# Altium PCB 电源1.PcbDoc
Units mil, origin at the board's own origin, x right, y up, seen from the top; angles counter-clockwise.
Board outline 3937.01 x 3937.01 mil, 2 copper layers (Top Layer, Bottom Layer); 57 components, 27 nets, 132 pads, 4 vias.
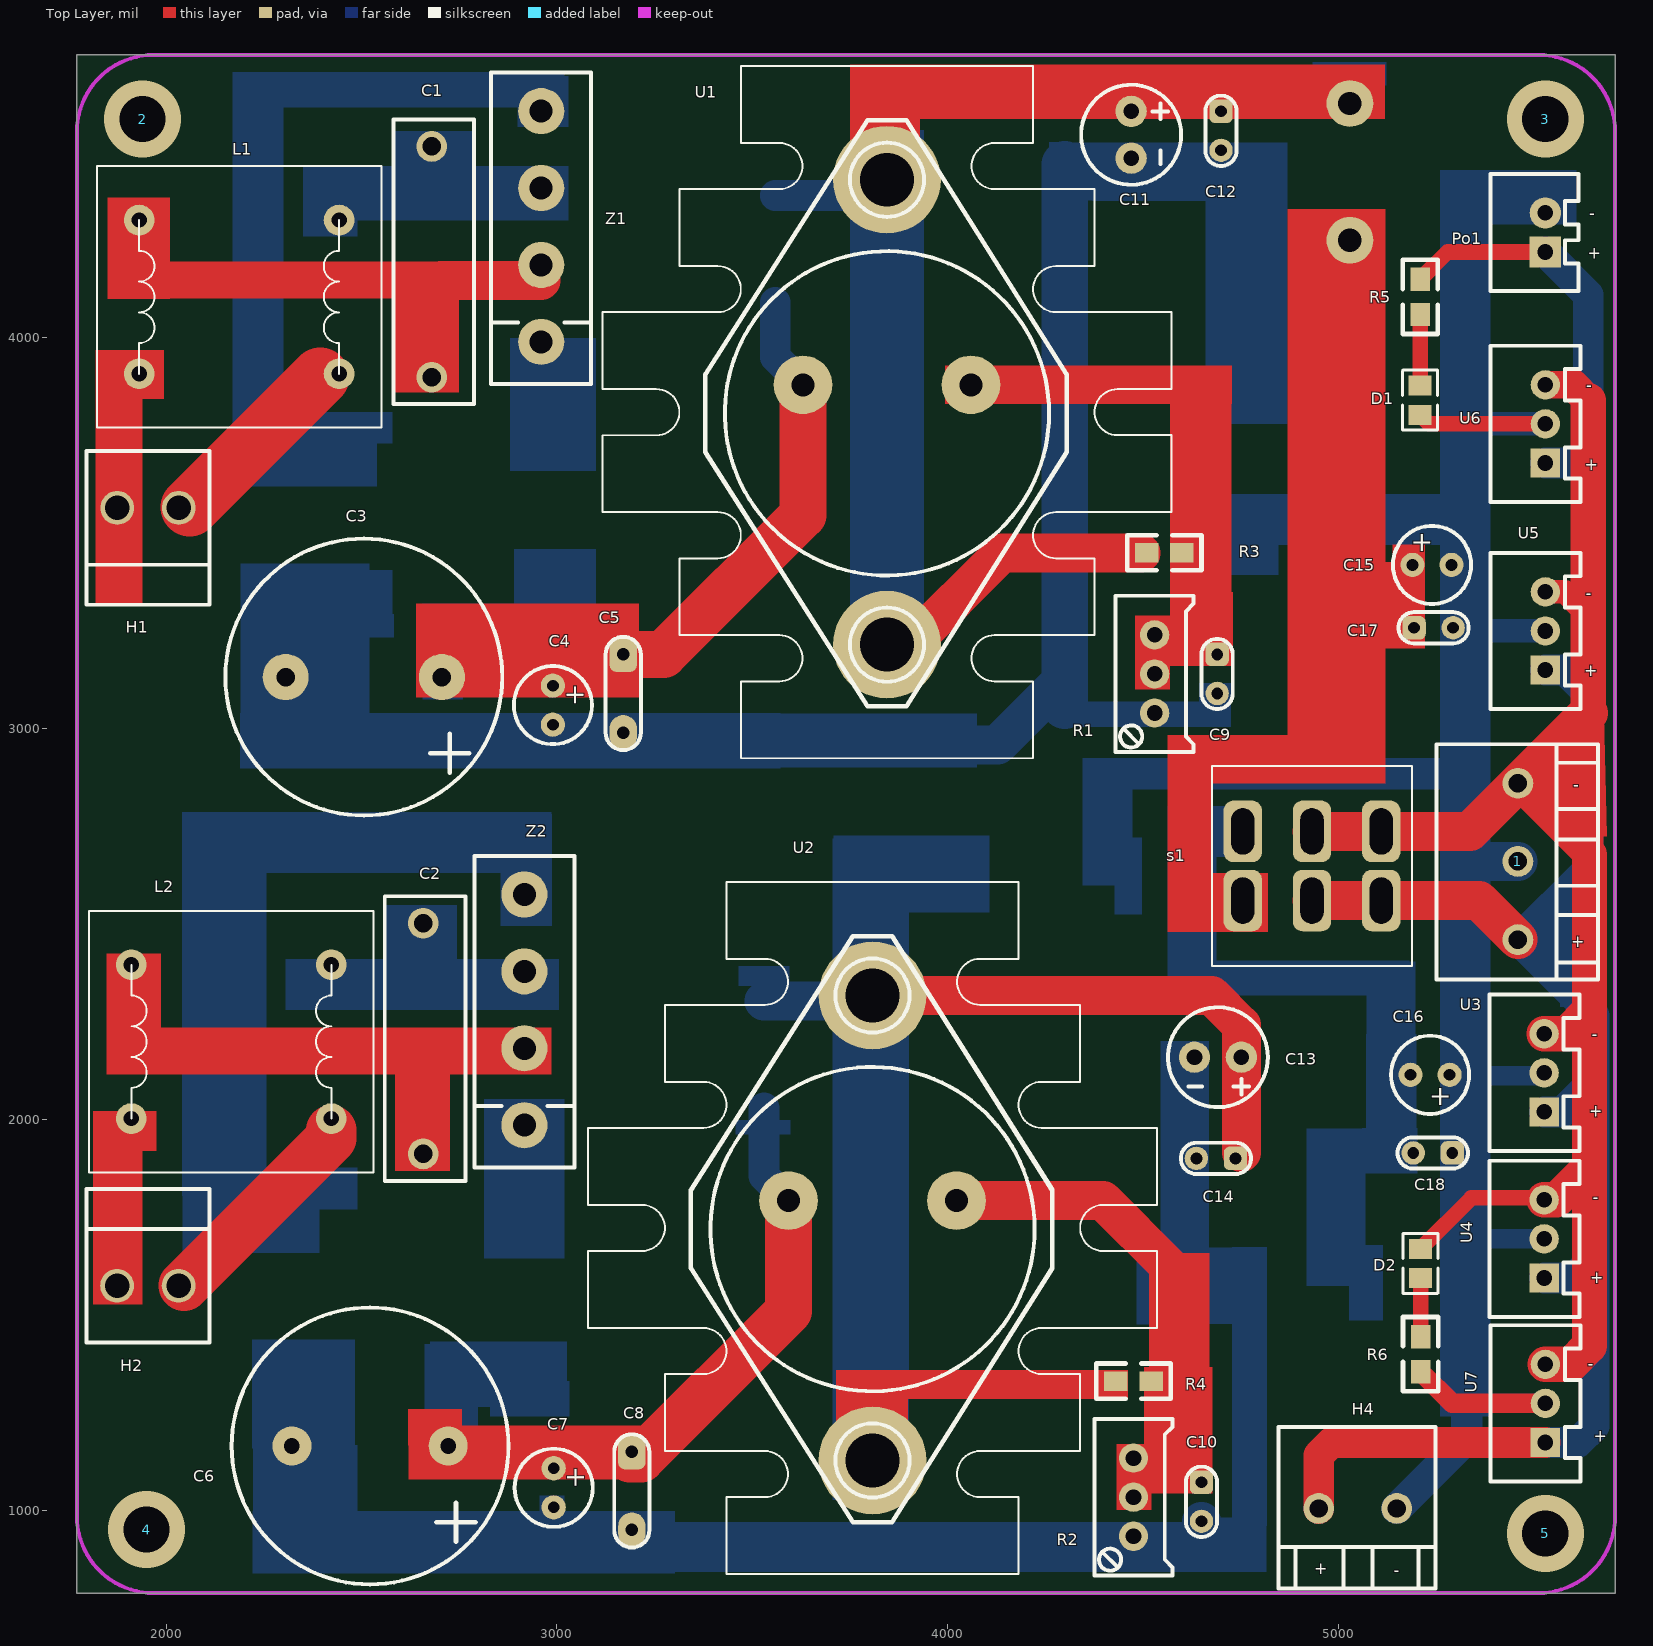
[diagram p0: Top Layer view]
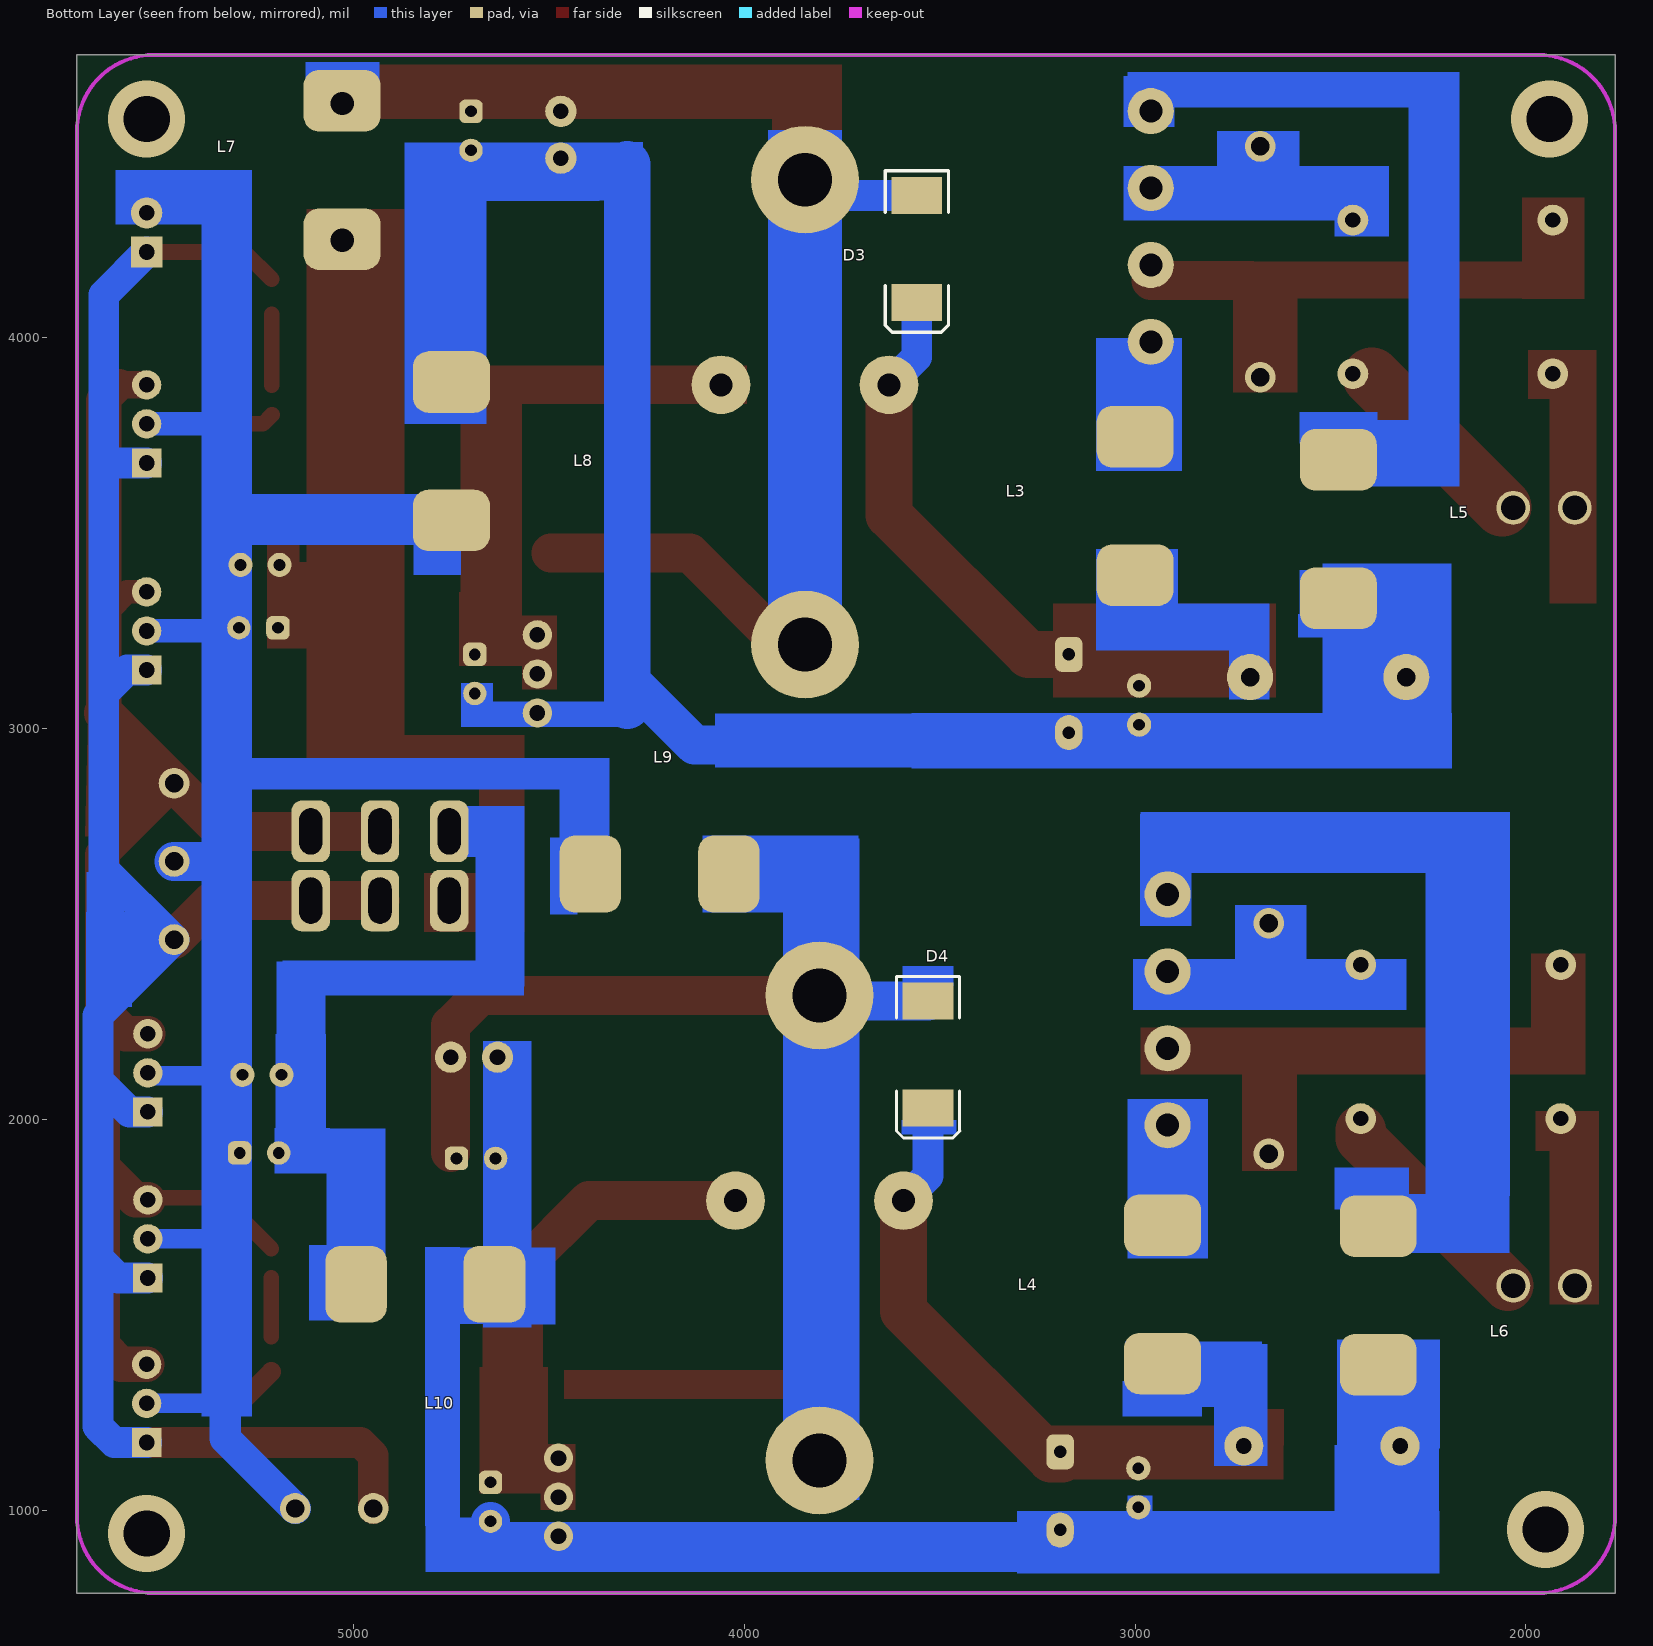
[diagram p1: Bottom Layer view, seen from below]

## Layer stack, top to bottom
Top Solder: solder mask 0.4, Solder Resist, Dk 3.5
Top Layer: signal copper 1.4
Dielectric1: dielectric 12.6, FR-4, Dk 4.8
Bottom Layer: signal copper 1.4
Bottom Solder: solder mask 0.4, Solder Resist, Dk 3.5

## Board outline
1771.65,4724.41 1771.65,787.4 5708.66,787.4 5708.66,4724.41 1771.65,4724.41

## Design rules (kind name [scope] priority, off if disabled: settings)
Clearance [All] p1: gap=10
Height [All] p1: minheight=0 maxheight=2362.2 prefheight=500
HoleSize [All] p1: absolutevalues=TRUE maxlimit=2362.2 minlimit=1 maxpercent=80.000 minpercent=20.000
MinimumSolderMaskSliver [All] p1: minsoldermaskwidth=0
PolygonConnect [All] p1: connectstyle=Relief reliefconductorwidth=10 reliefentries=4 polygonreliefangle="90 Angle" airgapwidth=10
RoutingVias [All] p1: holewidth=28 width=50 viastyle="Through Hole" minholewidth=28 minwidth=50 maxholewidth=1574.8 maxwidth=2362.2
SilkToSilkClearance [All] p1: silktosilkclearance=0
SilkToSolderMaskClearance [IsPad] p1: minsilkscreentomaskgap=0 clearancetoexposedcopper=TRUE
SolderMaskExpansion [All] p1: expansion=4
Width [All] p1: maxlimit=787.4 minlimit=10 preferedwidth=10
24 further rules are at their usual default settings.

## Components (designator, comment, footprint, x,y, rotation, side; value= is the part's Value field where it differs from the comment)
1 "KF128-5.08-3P" KF128-5.08-3P 5460,2860 r90 top
2 "螺丝孔" 固定过孔 1940,4560 r90 top
3 "螺丝孔" 固定过孔 5530,4560 r90 top
4 "螺丝孔" 固定过孔 1950,950 r90 top
5 "螺丝孔" 固定过孔 5530,940 r90 top
C1 "" 安规电容 2680,4490 r180 top
C2 "Cap1" 安规电容 2658,2502 r180 top
C3 "Cap1" 4700UF_50V#1 2706,3132 r180 top
C4 "Cap1" 22UF_50V 2990,3110 r270 top
C5 "Cap1" 独石电容 3170,3190 r180 top
C6 "Cap1" 4700UF_50V#2 2722,1164 r180 top
C7 "Cap1" 22UF_50V 2992,1107 r270 top
C8 "Cap1" 独石电容 3192,1149 r180 top
C9 "Cap" 陶瓷电容 4690,3190 r90 top
C10 "Cap" 陶瓷电容 4650,1071 r90 top
C11 "Cap" "C DIP DIA6.3" 4470,4580 r270 top
C12 "Cap" 陶瓷电容 4700,4580 r90 top
C13 "Cap" "C DIP DIA6.3" 4752,2159 r180 top
C14 "Cap" 陶瓷电容 4737,1900 r0 top
C15 "Cap" 22UF_50V 5190,3419 r0 top
C16 "Cap" 22UF_50V 5285,2114 r180 top
C17 "Cap" 陶瓷电容 5194,3258 r180 top
C18 "Cap" 陶瓷电容 5292,1914 r0 top
D1 "LED" 0805_s 5223,3820 r270 top
D2 "LED" 0805_s 5197,1652 r90 top
D3 "1N4002" SMC 3559,4228 r270 bottom
D4 "1N4002" SMC 3530,2166 r270 bottom
H1 "HT3.96-2P" HT39.6-2P-S 1875,3565 r90 top
H2 "HT3.96-2P" HT39.6-2P-S 2032,1574 r270 top
H4 "KF128-5.08-2P" KF128-5.08-2P 5150,1004 r0 top
L1 "扼流线圈" 扼流线圈 1931,3908 r90 top
L2 "扼流线圈" 扼流线圈 1911,2002 r90 top
L3 "SMD" "功率电感-12x12 - duplicate" 3000,3570 r270 bottom
L4 "SMD" "功率电感-12x12 - duplicate" 2930,1552 r270 bottom
L5 "SMD" "功率电感-12x12 - duplicate" 2480,3511 r270 bottom
L6 "SMD" "功率电感-12x12 - duplicate" 2378,1549 r270 bottom
L7 "SMD" "功率电感-12x12 - duplicate" 5030,4430 r270 bottom
L8 "SMD" "功率电感-12x12 - duplicate" 4750,3710 r270 bottom
L9 "SMD" "功率电感-12x12 - duplicate" 4217,2628 r0 bottom
L10 "SMD" "功率电感-12x12 - duplicate" 4817,1578 r0 bottom
Po1 "Power_2Port" Power_S_2Port 5530,4220 r90 top
R1 "可调电位器1" 电位器 4530,3040 r90 top
R2 "可调电位器1" 电位器 4476,933 r90 top
R3 "RES" 0805 4600,3450 r180 top
R4 "RES" 0805 4521,1330 r180 top
R5 "RES" 0805 5210,4060 r90 top
R6 "RES" 0805 5211,1444 r270 top
s1 "双掷开关" SWITCH 5110,2560 r180 top
U1 "LM338" LM338 3630,3880 r90 top
U2 "LM338" LM338 3593,1792 r90 top
U3 "XH2.54-3p" XH2.54-3p 5527,2019 r90 top
U4 "XH2.54-3p" XH2.54-3p 5527,1594 r90 top
U5 "XH2.54-3p" XH2.54-3p 5530,3150 r90 top
U6 "XH2.54-3p" XH2.54-3p 5530,3680 r90 top
U7 "XH2.54-3p" XH2.54-3p 5530,1173 r90 top
Z1 "整流桥" 整流桥 2960,3990 r180 top
Z2 "整流桥" 整流桥 2917,1985 r180 top

## Footprints (in the part's own frame and the unit in brackets; to place one, negate y for a bottom-side part, rotate by r counter-clockwise, add the part's x,y. Pads: shape width x height; smd on the part's side, far side on the other; paste and mask are expansions set on the pad)
22UF_50V [mil]
  round 62 hole 30: 1(0,0) 2(100,0)
  silkscreen extent -50,-100 150,100, body extent -47,-100 150,97, height 433
0805 [mil]
  rect 60x50 smd: 1(0,0) 2(90,0)
  silkscreen extent -50,-45 140,45
0805_s [mm]
  rect 1.3x1.499 smd: 1(0.425,-0.35) 2(-1.475,-0.35)
  silkscreen extent -2.47,-1.49 1.43,0.79
4700UF_50V#1 [mm]
  round 3 hole 1.2: 1(0,0) 2(10.16,0)
  silkscreen extent -3.92,-9 14.08,9, body extent -4.06,-9 14.22,9.28, height 41.36
4700UF_50V#2 [mm]
  round 2.54 hole 1.016: 1(0,0) 2(10.16,0)
  silkscreen extent -3.92,-9 14.08,9, body extent -4.06,-9 14.22,9.28, height 41.36
"C DIP DIA6.3" [mil]
  round 80 hole 40: 1(0,0) 2(120,0)
  silkscreen extent -68,-128 188,128
HT39.6-2P-S [mm]
  round 2.2 hole 1.6: 1(0,0) 2(0,-4)
  silkscreen extent -6.3,-6 3.7,2
KF128-5.08-2P [mm]
  round 2 hole 1.2: 1(0,0) 2(-5.08,0)
  silkscreen extent -7.68,-5.2 2.52,5.3, body extent -7.68,-5.1 2.42,5.2, height 14.1
KF128-5.08-3P [mm]
  round 2 hole 1.2: 1(0,0) 2(-5.08,0) 3(-10.16,0)
  silkscreen extent -12.76,-5.2 2.54,5.3, body extent -12.66,-5.1 2.34,5.2, height 14.1
LM338 [mm]
  round 3.81 hole 1.5: 1(0,0) 2(0,-10.922)
  round 7 hole 3.5: 3(-16.891,-5.461) 3(13.335,-5.461)
  silkscreen extent -24.28,-23.96 20.72,13.04, body extent -21.25,-18.03 17.55,6.97, height 8.8
Power_S_2Port [mil]
  rect 80x80 hole 40: 1(0,0)
  round 80 hole 40: 2(100,0)
  silkscreen extent -100,-85 200,140
SMC [mm] "DO-214-AB/SMC; 2 C-Bend Leads; Body 7.9 x 5.9 mm, inc. leads (LxW)"
  rect 2.4x3.3 smd: 1(-3.475,0) 2(3.475,0)
  silkscreen extent -5.07,-2.05 5.43,2.05
SWITCH [mm]
  rrect50% 2.5x4 hole 1.5 slot 3 at 90 deg: 1(0,0) 2(4.5,0) 3(9,0) 4(9,-4.5) 5(4.5,-4.5) 6(0,-4.5)
  silkscreen extent -2,-8.75 11,4.25, body extent -1.85,-8.18 10.85,3.63, height 30.58
XH2.54-3p [mil]
  rect 75x75 hole 40: 1(0,0)
  round 75 hole 40: 2(100,0) 3(200,0)
  silkscreen extent -100,-90 300,140
"功率电感-12x12 - duplicate" [mm]
  rrect50% 4x5 smd: 1(-4.5,0) 2(4.5,0)
  body extent -6.09,-6.16 6.22,6.16, height 8
固定过孔 [mil]
安规电容 [mm]
  round 2 hole 1.2: 1(0,0) 2(0,15)
  silkscreen extent -2.75,-1.75 2.5,16.75, body extent -2.75,-1.75 2.6,16.75, height 13
扼流线圈 [mm]
  round 2 hole 1: 1(0,0) 2(10,0) 3(10,-13) 4(0,-13)
  silkscreen extent -3.5,-15.75 13.5,2.75
整流桥 [mm]
  round 3 hole 1.5: 1(0,0) 2(0,-5) 3(0,-10) 4(0,-15)
  silkscreen extent -3.25,-17.5 3.25,2.75
独石电容 [mil]
  rrect50% 70x90 hole 32: 1(0,0)
  oval 70x90 hole 32: 2(0,200)
  silkscreen extent -45,-45 45,245, body extent -77,-18 73,218, height 335
电位器 [mil]
  round 75 hole 40: 1(0,0) 2(100,0) 3(200,0)
  silkscreen extent -100,-100 300,100
陶瓷电容 [mil]
  rrect50% 60x60 hole 30: 1(0,0)
  round 60 hole 30: 2(-100,0)
  silkscreen extent -140,-40 40,40, body extent -158,-49 59,49, height 217

## Part data
C1: library part Cap1
D3 D4: library part Diode, "Default Diode"
L3 L4 L5 L6 L7 L8 L9 L10: library part 功率电感

## Free pads (board coordinates)
  round 120 hole 60: 1(5030,4250) 1(5030,4600)

## Via types
v1: diameter 196.85, hole 118.11, Top Layer to Bottom Layer, 4 vias

## Nets (pads, with @x,y where several pads share a name; then routed paths per layer and width w, separated by ;. In a path a pad name is that pad's centre, name@x,y a point inside that pad or via, vN(x,y) a via of type N, cw(c..) or ccw(c..) an arc to the next point about the centre after c; other vN are vias at no path point)
Net1_1: 1.1 D2.1 s1.5 s1.6 U3.3 U4.3 U5.3 U6.3 U7.3 | length 4198.3
  Top Layer w30: 5625,3305 5640,3290
  Top Layer w40: D2.1 5341.05,1799 U4.3@5522,1799
  Top Layer w60: U5.3 5580,3350 5625,3305
  Top Layer w70: U6.3 5600,3880
  Top Layer w78.74: 1.1 5643,2677
  Top Layer w80: 5600,3880 5640,3840
  Top Layer w90: U4.3 5559,1794 5643,1878 ; U3.3 5584,2219 5643,2278 ; U7.3 5595.34,1373 5643,1420.66 5643,1878 ; 5640,3040 5640,3290 5640,3840 ; 5643,2677 5643,2278 ; 5643,1878 5643,2278
  Top Layer w100: s1.5 s1.6 5337.17,2737.17 1.1 5640,3040
Net1_2: 1.2 C15.2 C16.1 C17.2 C18.1 D1.1 H4.1 L8.2 L9.2 Po1.2 R6.2 U3.2 U4.2 U5.2 U6.2 U7.2 | length 2147.2
  Top Layer w40: D1.1 5232.49,3780 U6.2
  Top Layer w50: R6.2 5292,1273 U7.2 U7.2@5528,1275
  Bottom Layer w50: 5329,1281 5337,1273 U7.2 ; 5335,2112 5520,2112 U3.2 ; 5336,1694 U4.2
  Bottom Layer w60: 5330,3250 U5.2 ; 5330,3780 U6.2
  Bottom Layer w80: H4.1 5329,1183 5329,1281
  Bottom Layer w100: 5340,2660 1.2
Net1_3: 1.3 H4.2 Po1.1 R5.2 s1.1 s1.2 U3.1 U4.1 U5.1 U6.1 U7.1 | length 5548.7
  Top Layer w40: R5.2 5280,4220 Po1.1
  Top Layer w78.74: H4.2 4950,1140 4983,1173 U7.1
  Top Layer w100: s1.2 s1.1 5360,2560 1.3
  Bottom Layer w78.74: U4.1 5603.29,1594 5654.29,1645 ; U3.1 5574.29,2019 5654.29,2099 ; U7.1 5613,1173 5654.29,1214.29 5654.29,1645 ; U5.1 5580,3150 5640,3090 ; U6.1 5640,3680 ; Po1.1 5640,4110 5640,3680 ; 5640,3090 5640,3680 ; 5640,3090 5640,2640 1.3 5654.29,2265.71 5654.29,2099 ; 5654.29,1645 5654.29,2099
NetC1_1: C1.1 L1.3 Z1.3
NetC1_2: C1.2 L1.2 Z1.2 | length 256.9
  Top Layer w100: 2703.15,4146.85 Z1.2@2960,4146.85
NetC2_1: C2.1 L2.3 Z2.3
NetC2_2: C2.2 L2.2 Z2.2
NetC3_1: C3.1 C4.1 C5.1 D3.2 L3.2 U1.1 | length 1301.5
  Top Layer w78.74: 3050,3190 C5.1
  Top Layer w120: C5.1 3273,3190 3630,3547 U1.1
  Bottom Layer w78.74: D3.2 3559,3951 U1.1
NetC3_2: C3.2 C4.2 C5.2 C9.2 C11.2 C12.2 L5.2 L8.1 R1.1 | length 1726.5
  Bottom Layer w100: 4022,2958 4128,2958 4294.5,3124.5
  Bottom Layer w120: 4300,3059 4300,4444
NetC6_1: C6.1 C7.1 C8.1 D4.2 L4.2 U2.1 | length 1108.9
  Top Layer w120: C8.1@3187,1131 3215,1131 3593,1509 U2.1
  Bottom Layer w78.74: D4.2 3530,1855 U2.1
NetC6_2: C6.2 C7.2 C8.2 C10.2 C13.2 C14.2 L6.2 L10.1 R2.1 | length 61
  Bottom Layer w100: 4650,910 C10.2
NetC9_1: C9.1 R1.2 R1.3 R3.1 U1.2
NetC10_1: C10.1 R2.2 R2.3 R4.1 U2.2 | length 932.6
  Top Layer w78.74: 4566,1345 4595,1374
  Top Layer w100: U2.2 4398,1792 4566,1624 4566,1345
NetC11_1: C11.1 C12.1 D3.1 L7.1 pad.1@5030,4600 R3.2 U1.3 | length 993.2
  Top Layer w78.74: U1.3@3845,3215 U1.3@3905,3215
  Top Layer w100: U1.3@3905,3215 4140,3450 R3.2@4495,3450
  Bottom Layer w78.74: D3.1 U1.3@3804.81,4364.81
NetC13_1: C13.1 C14.1 D4.1 L9.1 R4.2 U2.3 | length 1585.4
  Top Layer w100: U2.3@3808,2317 4676,2317 4752,2241 C13.1 C14.1@4752,1915
  Bottom Layer w100: D4.1 3793.81,2302.81 U2.3@3808,2317
NetC15_1: C15.1 C17.1 L7.2 pad.1@5030,4250 s1.3
NetC16_2: C16.2 C18.2 L10.2 s1.4
NetD1_2: D1.2 R5.1 | length 181.1
  Top Layer w40: D1.2@5210,3878.85 R5.1
NetD2_2: D2.2 R6.1 | length 149.7
  Top Layer w40: R6.1@5210.78,1444.22 D2.2
NetH1_1: H1.1 L1.1
NetH1_2: H1.2 L1.4 | length 473.4
  Top Layer w150: H1.2@2060.15,3566.33 2394.91,3901.09
NetH2_1: H2.1 L2.4 | length 553.1
  Top Layer w130: H2.1@2046,1575 2422.81,1951.81 L2.4@2422.81,1972
NetH2_2: H2.2 L2.1
NetL3_1: L3.1 Z1.1 | length 162.8
  Bottom Layer w78.74: L3.1@2960,3787.17 Z1.1@2960,3950
NetL4_1: L4.1 Z2.1
NetL5_1: L5.1 Z1.4
NetL6_1: L6.1 Z2.4
copper on no net:
  other v1: 5530,940 1950,950 1940,4560 5530,4560

## Keep-outs
Keep-Out Layer:
  lines w10: 1771.65,984.25 ccw(c1968.5,984.25) 1968.5,787.4 5511.81,787.4 ccw(c5511.81,984.25) 5708.66,984.25 5708.66,4527.56 ccw(c5511.81,4527.56) 5511.81,4724.41 1968.5,4724.41 ccw(c1968.5,4527.56) 1771.65,4527.56 1771.65,984.25

## Other copper
Top Layer:
  rectangle net NetH1_1: 1938,3844 1995,3969
  rectangle net Net1_1: 5636,2689 5679,2738
  rectangle net Net1_1: 5490,2850 5531,2894
  rectangle net Net1_1: 5521,2775 5600,2958
  region net Net1_1: 5596.01,2722.15 5687.86,2724.51 5679.86,3036.41 5588.01,3034.05
  rectangle net NetC10_1: 4433,1000 4522,1169
  rectangle net NetC10_1: 4503,1042 4678,1366
  rectangle net NetC13_1: 3715,1110 3899,1358
  rectangle net NetC13_1: 3748,1284 4462,1358
  rectangle net NetC10_1: 4520,1278 4671,1658
  rectangle net NetC6_1: 2619,1165 2757,1258
  rectangle net NetC6_1: 2621,1078 3241,1216
  rectangle net NetC2_2: 2586,1868 2727,2133
  rectangle net NetC2_2: 1847,2115 2986,2235
  rectangle net NetC2_2: 1847,2214 1987,2424
  rectangle net NetH2_2: 1813,1919 1976,2021
  rectangle net NetH2_2: 1813,1526 1939,2020
  rectangle net NetC15_1: 5097,3205 5222,3427
  rectangle net NetC3_1: 2640,3080 3210,3320
  rectangle net NetC15_1: 4563,2860 5090,2984
  rectangle net NetC15_1: 4563,2480 4680,2970
  rectangle net NetC15_1: 4680,2480 4820,2630
  rectangle net NetC15_1: 4870,2860 5121,4330
  rectangle net NetC9_1: 4480,3100 4570,3290
  rectangle net NetC9_1: 4570,3160 4731,3350
  rectangle net NetC11_1: 3750,4380 3930,4680
  rectangle net NetC11_1: 3750,4560 5120,4700
  rectangle net NetC11_1: 4650,4560 5110,4680
  rectangle net NetC1_2: 1850,4101 2889,4195
  rectangle net NetC1_2: 1850,4100 2010,4359
  rectangle net NetH1_1: 1819,3320 1940,3969
  rectangle net NetC9_1: 4570,3350 4727,3917
  rectangle net NetC1_2: 2585,3860 2750,4195
  rectangle net NetC15_1: 5139,3403 5222,3471
  rectangle net NetC9_1: 3994,3831 4728,3930
Bottom Layer:
  rectangle net Net1_2: 4427,2524 4498,2721
  rectangle net NetC13_1: 3465,2341 3595,2393
  rectangle net NetC6_1: 3457,1961 3598,1998
  rectangle net NetC3_2: 2378,3233 2583,3293
  rectangle net NetL5_1: 2380,3730 2580,3811
  rectangle net NetL6_1: 2299,1769 2490,1877
  rectangle net NetC6_1: 2829,1239 3032,1330
  rectangle net NetC6_2: 4484,1475 4619,1672
  rectangle net NetC16_2: 5027,1485 5114,1679
  rectangle net NetC11_1: 4934,4646 5124,4706
  rectangle net Net1_2: 4726,3393 4847,3483
  rectangle net NetC3_1: 2656,3075 2760,3271
  rectangle net Net1_3: 5568,2288 5685,2531
  rectangle net Net1_3: 5510,2395 5615,2512
  rectangle net Net1_3: 5587,2512 5684,2633
  rectangle net NetC3_2: 4644,3009 4726,3117
  rectangle net NetC3_2: 4291,3004 4726,3069
  rectangle net Net1_2: 4345,2599 4474,2877
  rectangle net Net1_2: 4346,2844 5283,2925
  rectangle net NetC3_2: 4472,3016 4573,3064
  rectangle net NetC16_2: 5072,2171 5198,2404
  rectangle net NetC16_2: 4564,2317 5183,2407
  rectangle net NetC16_2: 4563,2340 4688,2720
  rectangle net NetC16_2: 4563,2672 4800,2802
  rectangle net NetC16_2: 5071,1978 5200,2218
  rectangle net NetC16_2: 5061,1862 5203,1978
  rectangle net NetC16_2: 4919,1573 5070,1976
  rectangle net NetC6_2: 4564,1476 4805,1672
  rectangle net NetC6_2: 4728,959 4818,1673
  rectangle net NetC6_2: 4639,1486 4794,1637
  rectangle net NetC6_2: 4691,841 4817,981
  rectangle net NetC6_2: 3141,842 4704,969
  rectangle net NetC13_1: 3706,1026 3902,2719
  rectangle net NetC6_1: 2661,1113 2798,1425
  rectangle net NetC6_1: 2675,1264 3026,1432
  rectangle net NetC6_2: 2956,984 3020,1037
  rectangle net NetC6_2: 2222,990 2490,1166
  rectangle net NetC6_2: 2221,837 3302,998
  rectangle net NetC6_2: 2220,1158 2483,1437
  rectangle net NetL4_1: 2814,1644 3020,2052
  rectangle net NetL6_1: 2041,2631 2986,2786
  rectangle net NetL6_1: 2856,2495 2988,2781
  rectangle net NetL6_1: 2041,1804 2257,2748
  rectangle net NetL6_1: 2042,1658 2392,1809
  rectangle net NetC2_1: 2561,2378 2744,2548
  rectangle net NetC2_1: 2306,2280 3005,2411
  rectangle net Net1_2: 5260,4290 5610,4430
  rectangle net NetC3_1: 2890,3290 3100,3460
  rectangle net NetC3_1: 2656,3200 3100,3320
  rectangle net NetC3_2: 2190,3280 2580,3406
  rectangle net NetC3_2: 2190,3010 2520,3423
  rectangle net Net1_2: 4700,3470 5380,3600
  rectangle net Net1_2: 5260,1240 5390,4390
  rectangle net NetL5_1: 2900,4540 3030,4670
  rectangle net NetL5_1: 2220,3620 2540,3790
  rectangle net NetL5_1: 2170,3620 2300,4680
  rectangle net NetL5_1: 2180,4590 3020,4680
  rectangle net NetC1_1: 2350,4259 2490,4420
  rectangle net NetC1_1: 2580,4400 2790,4530
  rectangle net NetC1_1: 2350,4300 3030,4440
  rectangle net NetC3_2: 4371,4350 4770,4500
  rectangle net NetC3_2: 4660,3780 4870,4500
  rectangle net NetC3_2: 4400,4420 4530,4500
  rectangle net NetC3_2: 4260,3036 4316,4502
  rectangle net NetC11_1: 3750,3127 3940,4532
  rectangle net NetL3_1: 2880,3660 3100,4000
  rectangle net NetC13_1: 3708,2530 4108,2726
  rectangle net NetC6_2: 4545,1467 4669,2201
  rectangle net NetC3_2: 2189,2898 3572,3040
  rectangle net NetC3_2: 3538,2900 4076,3039
  rectangle net NetC3_2: 4260,4352 4518,4500

## Silkscreen, mask and mechanical layers (free items; w line width, h text height)
Top Overlay:
  text "-" at 5643,4305 h30
  text "+" at 5639,4203 h30
  text "-" at 5635,3865 h30
  text "+" at 5631,3661 h30
  text "-" at 5634,3332 h30
  text "+" at 5630,3134 h30
  text "-" at 5602,2842 h30
  text "+" at 5597,2440 h30
  text "-" at 5649,2204 h30
  text "+" at 5642,2006 h30
  text "-" at 5652,1786 h30
  text "+" at 5645,1581 h30
  text "-" at 5638,1360 h30
  text "+" at 5654,1175 h30
  text "+" at 4939,836 h30
  text "-" at 5142,832 h30
Bottom Solder:
  rectangle: 4506,1485 4598,1663
  rectangle: 5030,1483 5111,1677
  rectangle: 3910,2526 4016,2722
  rectangle: 4390,2523 4524,2729
  rectangle: 2910,3742.17 3111,3874
  rectangle: 2902,3267 3090,3419
  rectangle: 2380,3235 2581,3367
  rectangle: 2385,3751 2581,3809
  rectangle: 2259,1234 2484,1412
  rectangle: 2272,1757 2484,1865
  region: 2825.49,1764.71 3032.7,1782.76 3025.85,1861.47 2818.63,1843.42
  rectangle: 2824,1237 3028,1329
  rectangle: 4648,3934 4844,4037
  rectangle: 4652,3402 4852,3534
  rectangle: 4945,4648 5111,4714
  rectangle: 4937,4126 5119,4210
  rectangle: 3488,4376 3624,4383
  rectangle: 3492,4388 3619,4458
  rectangle: 3488,4019 3628,4060
  rectangle: 3466,2349 3594,2391
  rectangle: 3458,1959 3599,1990

## Text inside footprints (layer, text, board x,y; h text height)
C4: Top Overlay "+" at 3025,3115 h50 r270
C7: Top Overlay "+" at 3027,1112 h50 r270
C15: Top Overlay "+" at 5185,3454 h50
C16: Top Overlay "+" at 5290,2079 h50 r180